# EAGLE board Project3 (EAGLE 9.2.2)
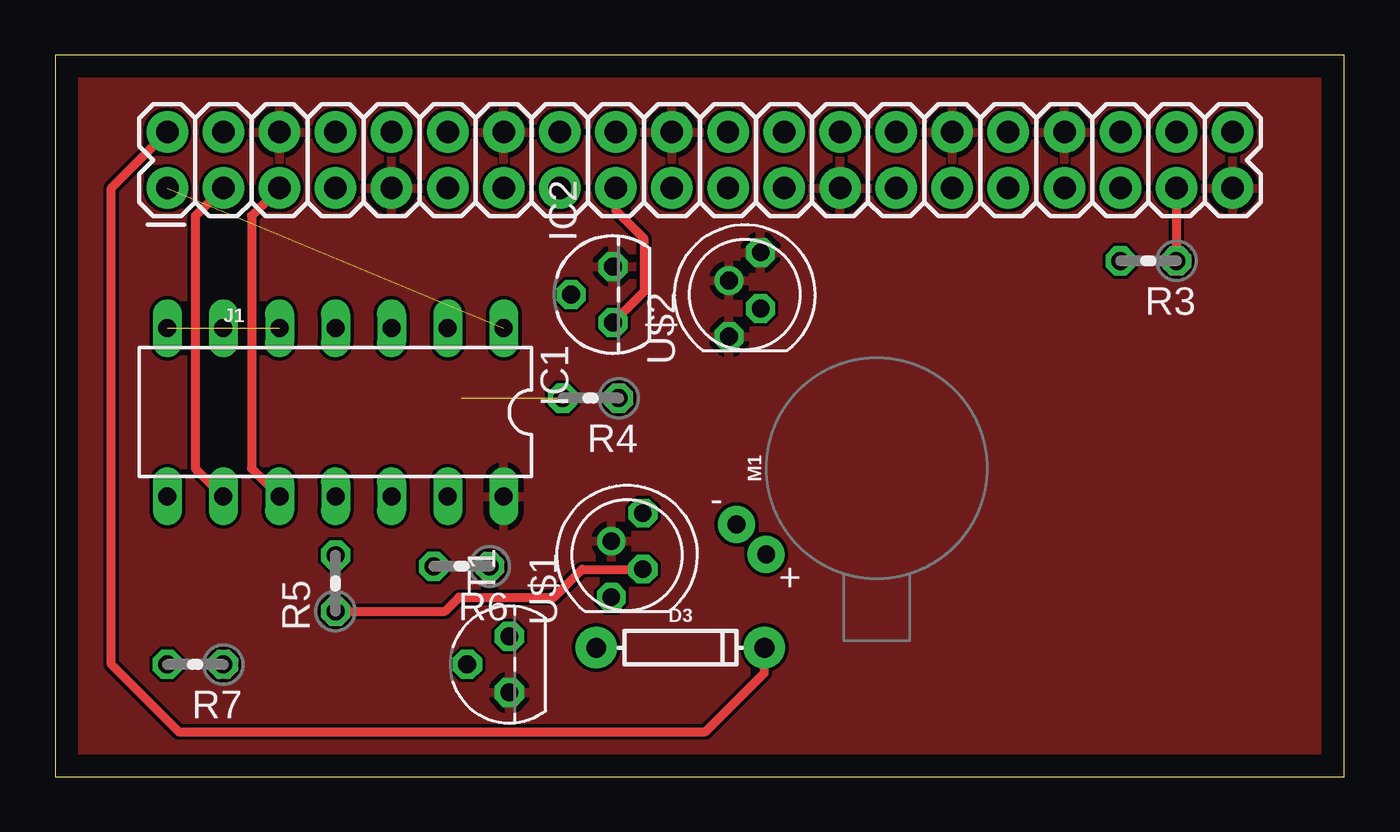
[diagram p0: board, top side]
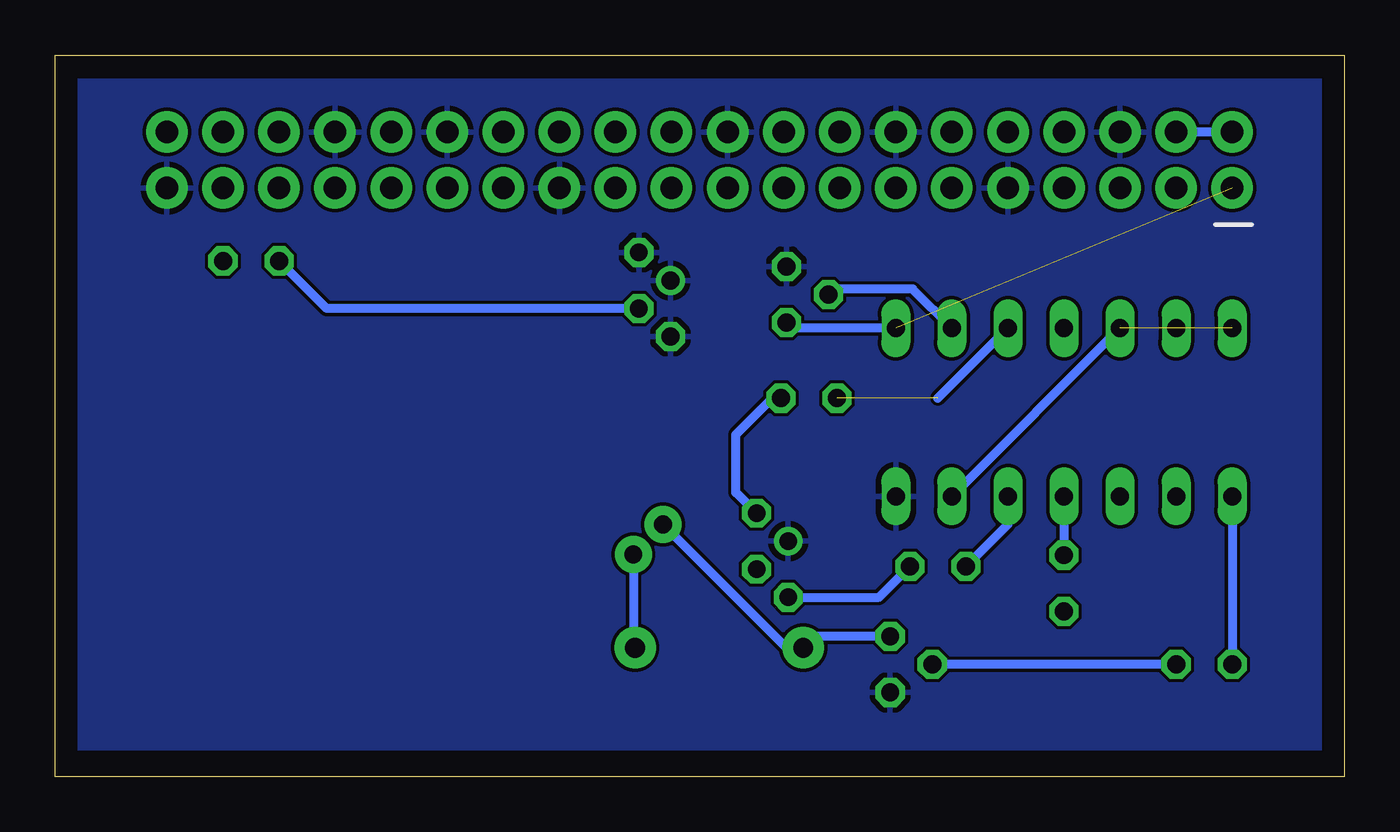
[diagram p1: board, bottom side, seen from below]

Size 58.4 x 32.69 mm. Coordinates in mm from the lower left corner, seen from the top.
Outline: 0,0 58.4,0 58.4,32.69 0,32.69 0,0
Copper layers (1*16): Top 0.035mm / dielectric 1.5mm / Bottom 0.035mm
Design rules "default": minimum track width 6mil, minimum drill 0.35mm, track to track 6mil, track to pad 6mil, pad to pad 6mil, via to via 6mil, smd to smd 6mil, copper to edge 40mil, drill to drill 6mil, minimum pad ring 10mil, minimum via ring 8mil, stop-mask expansion 4mil, vias tented up to drill 0mil, thermal gap 10mil

## Footprints (pad centres in the part's own frame; a part is rotated, then mirrored left to right if it is on the bottom)
DIODE-1N4148 = drill 0.9 pad 1.88: A -3.81,0; C 3.81,0
DIL14 = drill 0.813 long: 1 -7.62,-3.81; 2 -5.08,-3.81; 3 -2.54,-3.81; 4 0,-3.81; 5 2.54,-3.81; 6 5.08,-3.81; 7 7.62,-3.81; 8 7.62,3.81; 9 5.08,3.81; 10 2.54,3.81; 11 0,3.81; 12 -2.54,3.81; 13 -5.08,3.81; 14 -7.62,3.81
TO92 = drill 0.813 octagon: 1 -1.27,0; 2 0,1.905; 3 1.27,0
2X20 = drill 1.016 pad 1.88: 1 0,0; 2 0,2.54; 3 2.54,0; 4 2.54,2.54; 5 5.08,0; 6 5.08,2.54; 7 7.62,0; 8 7.62,2.54; 9 10.16,0; 10 10.16,2.54; 11 12.7,0; 12 12.7,2.54; 13 15.24,0; 14 15.24,2.54; 15 17.78,0; 16 17.78,2.54; 17 20.32,0; 18 20.32,2.54; 19 22.86,0; 20 22.86,2.54; 21 25.4,0; 22 25.4,2.54; 23 27.94,0; 24 27.94,2.54; 25 30.48,0; 26 30.48,2.54; 27 33.02,0; 28 33.02,2.54; 29 35.56,0; 30 35.56,2.54; 31 38.1,0; 32 38.1,2.54; 33 40.64,0; 34 40.64,2.54; 35 43.18,0; 36 43.18,2.54; 37 45.72,0; 38 45.72,2.54; 39 48.26,0; 40 48.26,2.54
VIBE-MOTOR-10MM = drill 0.8 pad 1.676: + -5,-3.9; - -6.35,-2.54
0204V = drill 0.813 octagon: 1 -1.27,0; 2 1.27,0
TO92' = drill 0.813 octagon: 1 1.27,0; 2 0,1.905; 3 -1.27,0
LED5MMRGB = drill 0.8 pad 0.813 octagon: P$1 -1.905,0.714; P$2 -0.635,-0.714; P$4 1.905,-0.714 | drill 0.8 pad 0.813: P$3 0.635,0.714

## Placement (x,y rotation side)
D3  200mA/100V/1V  [DIODE-1N4148]  28.32,5.84 0 top
IC1  PIC16F676P  [DIL14]  12.7,16.51 180 top
IC2  LM35CZ  [TO92]  25.27,21.84 90 top
J1  RASPBERRYPI-40-PIN-GPIO_PTH_NO_SHROUD  [2X20]  5.08,26.67 0 top
M1  MOTOR10MM  [VIBE-MOTOR-10MM]  37.21,13.97 0 top
R3  [0204V]  49.53,23.37 180 top
R4  [0204V]  24.26,17.14 180 top
R5  [0204V]  12.7,8.76 90 top
R6  [0204V]  18.41,9.53 180 top
R7  [0204V]  6.35,5.08 180 top
T1  2N3904  [TO92']  20.57,5.08 90 top
U$1  5MMRGBLED  [LED5MMRGB]  25.91,10.03 90 top
U$2  5MMRGBLED  [LED5MMRGB]  31.24,21.84 90 top

## Library data of the parts
D3 = SparkFun-DiscreteSemi; PROD_ID: DIO-08378
IC1 = microchip; MF: MICROCHIP; MPN: PIC16F676-I/P; OC_FARNELL: 9760512; OC_NEWARK: 54K2829
IC2 = lm35
J1 = SparkFun-Connectors
M1 = SparkFun-Electromechanical; PROD_ID: COMP-08572; SF_SKU: ROB-08449
R3-R7 = rcl; SPICEPREFIX: R
T1 = transistor
U$1 U$2 = led_rgb

## Nets
GND: IC1.14 IC2.3 J1.6 J1.9 J1.14 J1.20 J1.25 J1.30 J1.34 J1.39 T1.3 U$1.P$3 U$2.P$1 U$2.P$3 U$2.P$4
N$1: D3.C J1.2 J1.4 M1.+
N$2: D3.A M1.- T1.1
N$3: IC1.10 J1.5
N$4: IC1.9 J1.3
N$5: R7.1 T1.2
N$6: IC1.2 IC2.2
N$7: IC1.1 IC2.1 J1.1 J1.17
N$8: IC1.8 R7.2
N$9: IC1.5 IC1.6 IC1.7 IC1.13
N$10: IC1.3 R4.2
N$11: R4.1 U$1.P$4
N$12: R5.1 U$1.P$2
N$13: IC1.11 R5.2
N$14: R6.1 U$1.P$1
N$15: IC1.12 R6.2
N$16: J1.37 R3.1
N$17: R3.2 U$2.P$2

## Tracks (layer width: path | path; a pad name or v marks a point on that pad's centre or on a via)
GND
  Top 0.152: 15.34,26.77 J1.9 | 45.82,29.21 J1.34
  pour Bottom: 0,31.75 0,1.27 5.08,1.27 58.42,1.27 58.42,3.81 58.42,31.75 53.34,31.75
  pour Top: 0,31.75 0,1.27 1.27,0 57.15,0 58.42,1.27 58.42,31.75 57.15,33.02 1.27,33.02
N$1
  Top 0.406: J1.2 2.54,26.67 2.54,5.08 5.59,2.03 29.46,2.03 32.13,4.7 D3.C
  Bottom 0.406: J1.2 J1.4 | M1.+ 32.21,5.92 D3.C
N$2
  Bottom 0.406: M1.- 25.27,5.84 D3.A 24,6.35 T1.1
N$3
  Top 0.406: J1.5 8.89,25.4 8.89,13.97 IC1.10
N$4
  Top 0.152: 7.72,26.62 J1.3
  Top 0.406: J1.3 6.35,25.4 6.35,13.97 IC1.9
N$5
  Bottom 0.406: R7.1 T1.2
N$6
  Bottom 0.406: IC1.2 19.56,22.1 23.11,22.1 IC2.2
N$7  (1 unrouted)
  Top 0.406: J1.17 25.4,25.65 26.67,24.38 26.67,21.97 IC2.1
  Bottom 0.406: IC1.1 25.02,20.32 IC2.1
N$8
  Bottom 0.406: IC1.8 R7.2
N$9  (2 unrouted)
  Bottom 0.406: IC1.5 IC1.13
N$10  (1 unrouted)
  Bottom 0.406: IC1.3 18.41,17.14
N$11
  Bottom 0.406: U$1.P$4 27.56,12.87 27.56,15.49 25.91,17.14 R4.1
N$12
  Top 0.406: U$1.P$2 23.88,9.4 22.61,8.13 18.29,8.13 17.65,7.49 R5.1
N$13
  Bottom 0.406: IC1.11 R5.2
N$14
  Bottom 0.406: U$1.P$1 21.08,8.13 R6.1
N$15
  Bottom 0.406: IC1.12 15.24,11.43 R6.2
N$16
  Top 0.406: J1.37 R3.1
N$17
  Bottom 0.406: U$2.P$2 46.1,21.21 R3.2